# Altium PCB 矩形板V2.0.pcbdoc (part 1 of 2)
Units mm, origin at the board's own origin, x right, y up, seen from the top; angles counter-clockwise.
Board outline 153.82 x 190.84 mm, 2 copper layers (Top Layer, Bottom Layer); 141 components, 208 nets, 656 pads, 250 vias.
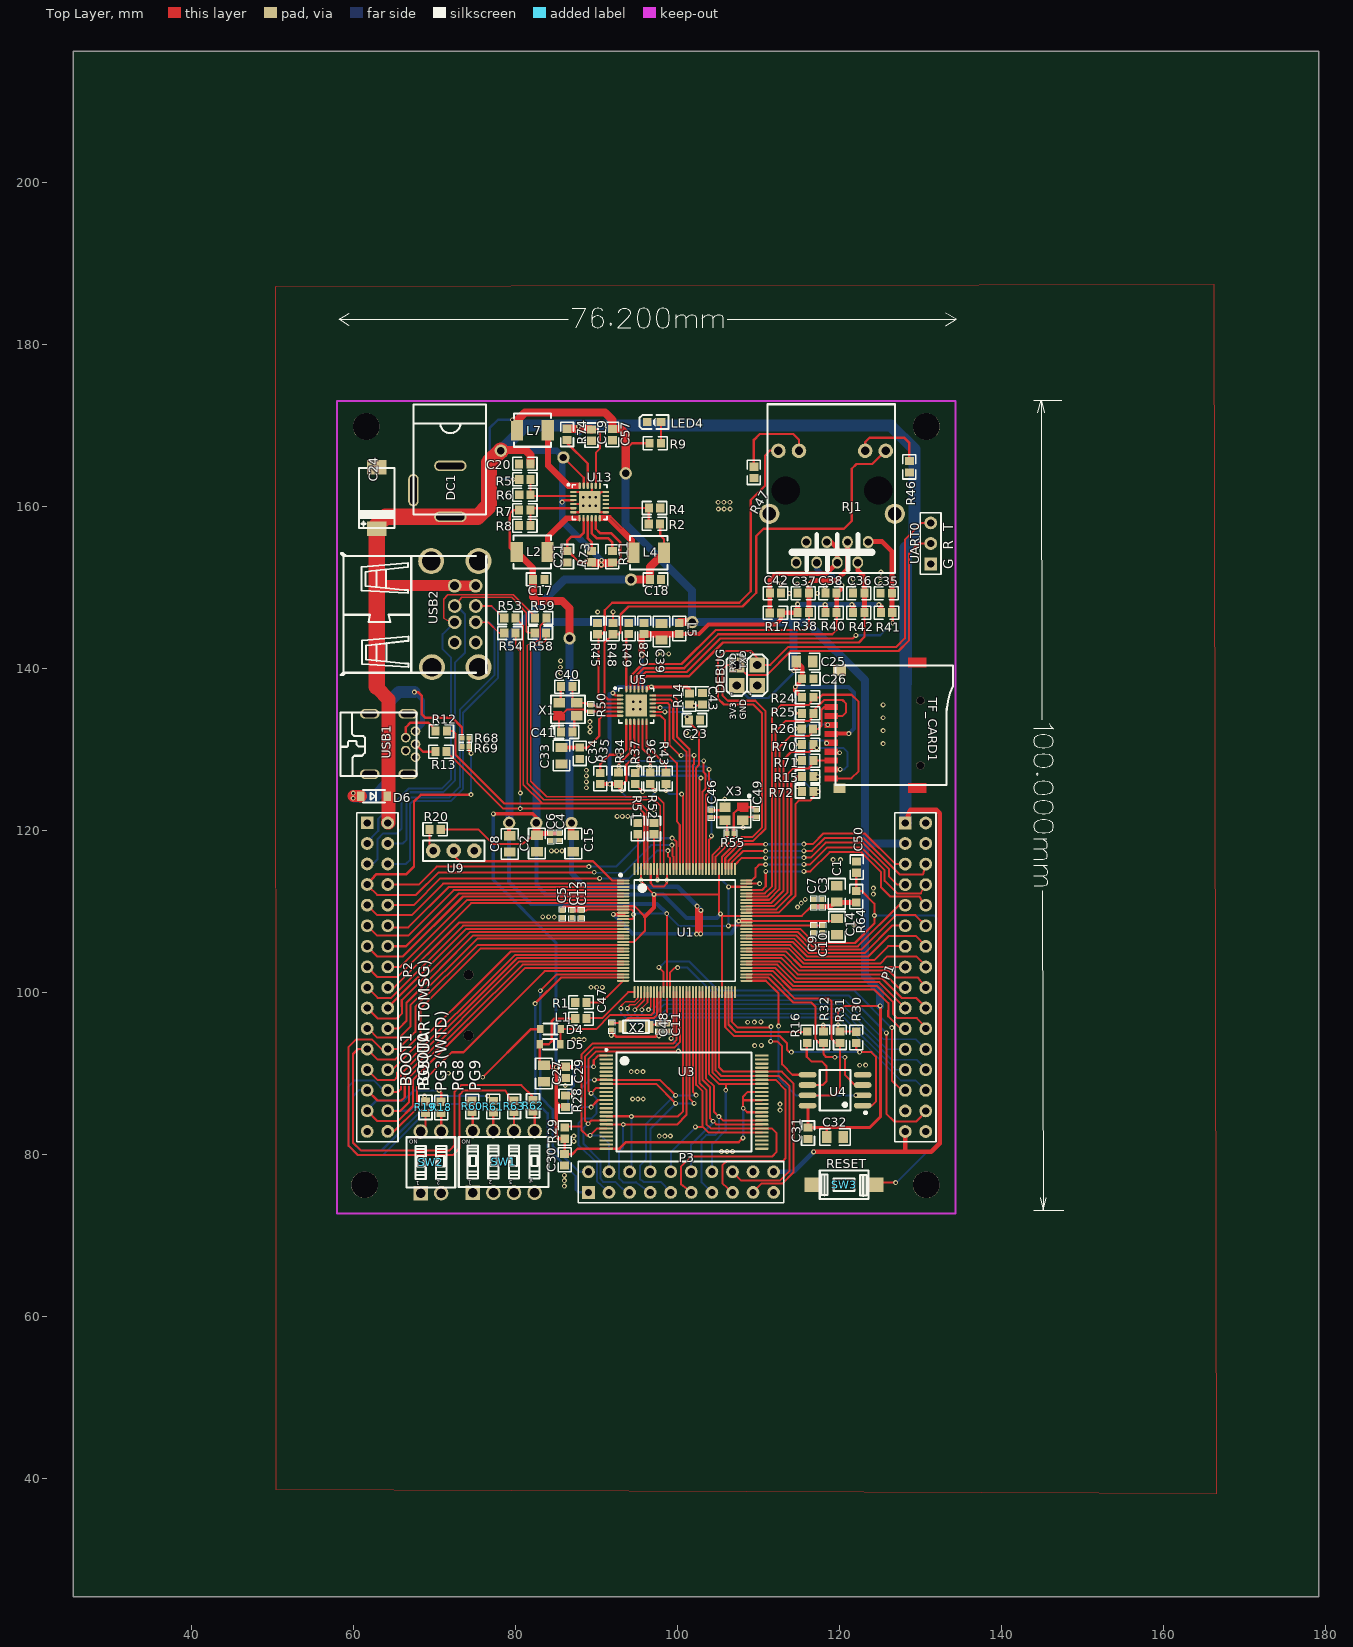
[diagram p0: Top Layer view]
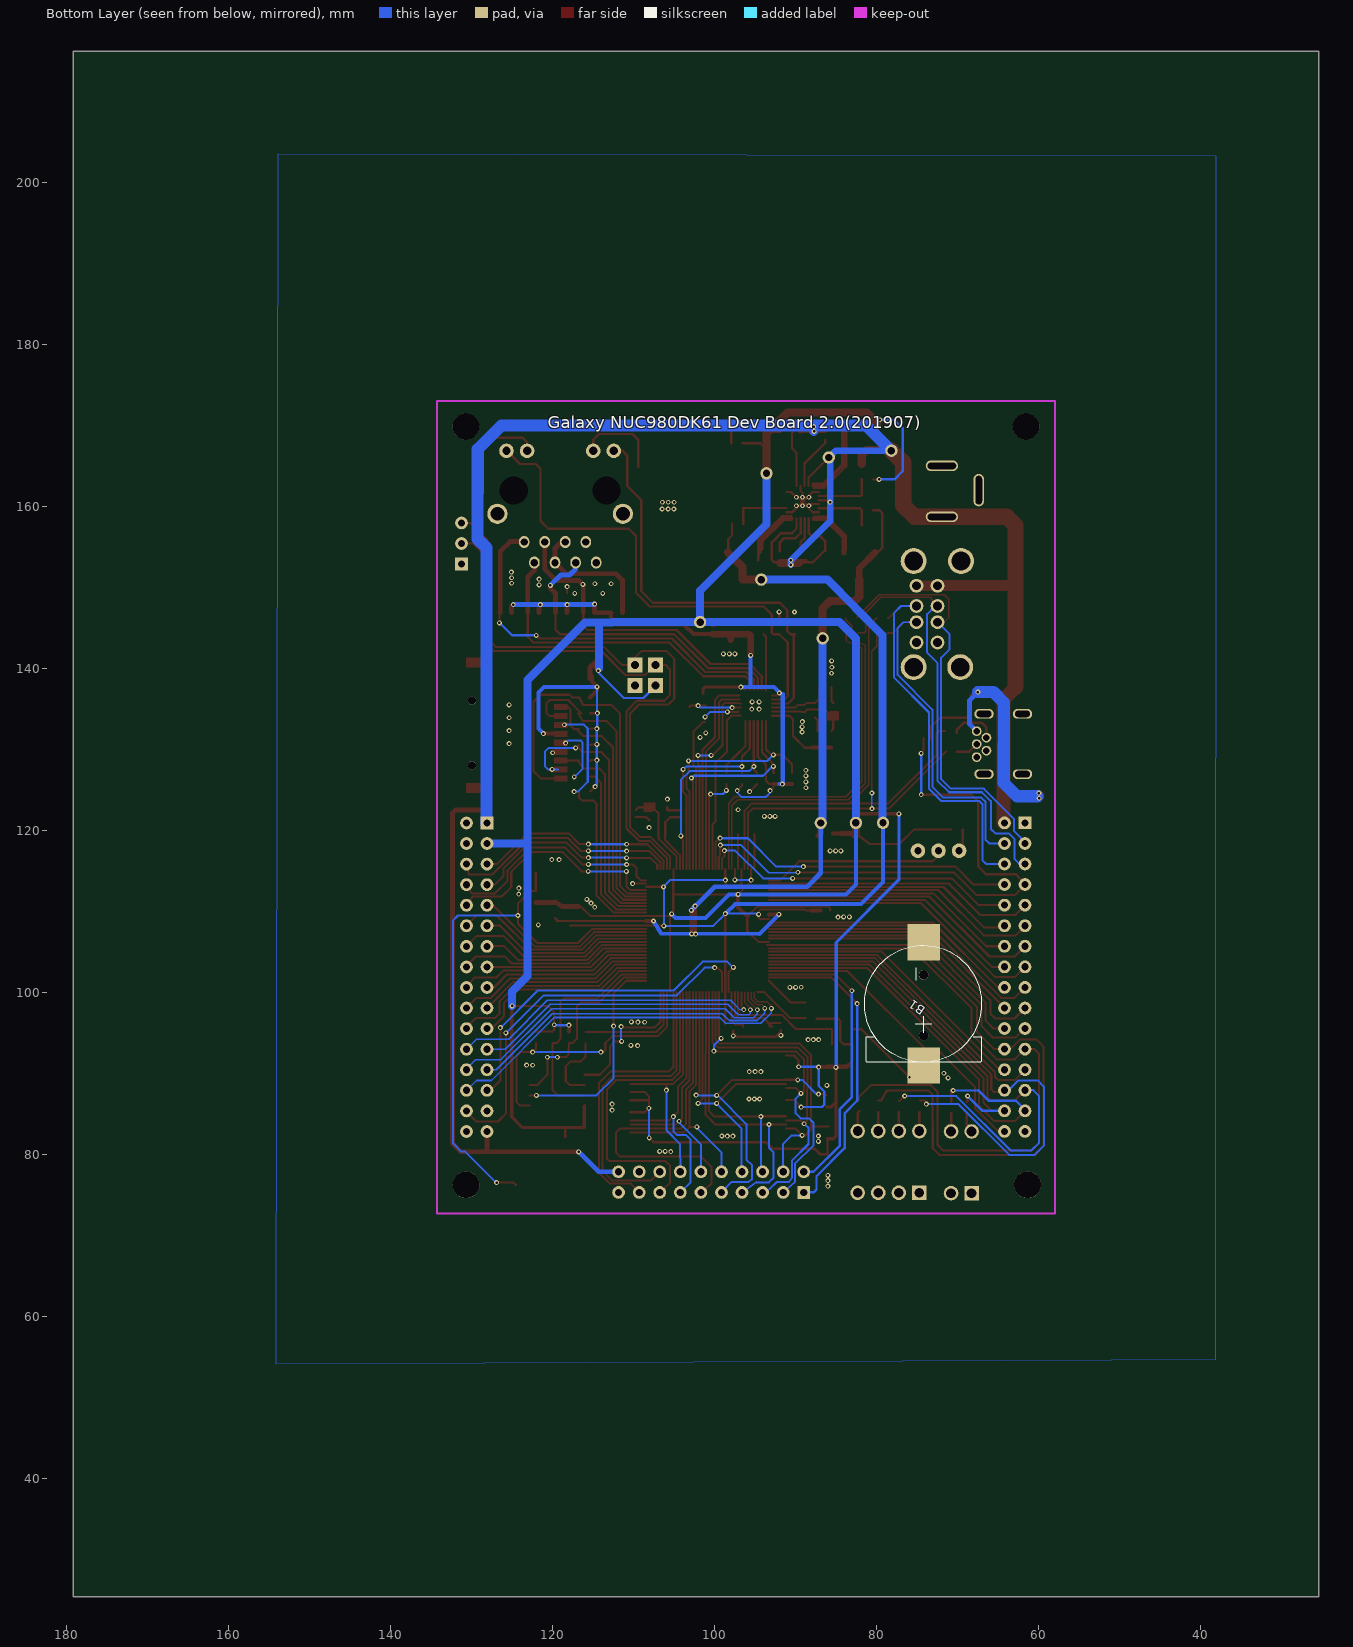
[diagram p1: Bottom Layer view, seen from below]

## Layer stack, top to bottom
Top Layer: signal copper (thickness not stored)
Dielectric: dielectric 0.32, FR-4, Dk 4.8
Bottom Layer: signal copper (thickness not stored)

## Board outline
179.22,25.4 25.4,25.4 25.4,216.24 179.22,216.24

## Components (designator, comment, footprint, x,y, rotation, side; value= is the part's Value field where it differs from the comment)
B1 "CR1220-2" BATTERY-2 74.21,98.62 r270 bottom
C1 "10uF" 0805 119.686,112.199 r270 top
C2 "10uF" 0805 82.652,118.431 r90 top
C3 "100nF" 0402 117.87,111.06 r270 top
C4 "100nF" 0402 85.41,119.24 r90 top
C5 "100nF" 0402 85.79,109.72 r90 top
C6 "100nF" 0402 84.33,119.22 r90 top
C7 "100nF" 0402 116.85,111.06 r270 top
C8 "10uF" 0805 79.29,118.376 r90 top
C9 "100nF" 0402 116.85,107.84 r90 top
C10 "100nF" 0402 117.93,107.84 r90 top
C11 "100nF" 0402 98.75,95.72 r90 top
C12 "100nF" 0402 86.97,109.7 r90 top
C13 "100nF" 0402 88.13,109.7 r90 top
C14 "10uF" 0805 119.71,108.14 r90 top
C15 "10uF" 0805 87.15,118.42 r90 top
C17 "10uF" 0603 82.866,151.022 r180 top
C18 "22uF" 0603 97.296,151.012 r180 top
C19 "10uF" 0603 89.396,168.842 r90 top
C20 "10uF" 0603 81.158,165.289 r0 top
C21 "10uF" 0603 86.376,153.832 r90 top
C23 "15pF" 0603 102.11,133.66 r180 top
C24 "470uF" CAP-T7343-D 62.88,161.07 r90 top
C25 "10uF" 0805 115.69,140.88 r180 top
C26 "100nF" 0603 116.11,138.76 r180 top
C27 "10uF" 0805 83.513,90.014 r90 top
C28 "100nF" 0603 95.89,144.96 r270 top
C29 "100nF" 0603 86.18,90.141 r270 top
C30 "100nF" 0603 86.07,79.36 r90 top
C31 "100nF" 0603 116.13,82.64 r270 top
C32 "10uF" 0805 119.46,82.164 r0 top
C33 "10uF" 0805 85.686,129.249 r270 top
C34 "100nF" 0603 87.936,129.549 r270 top
C35 "10pF" 0603 125.791,149.316 r180 top
C36 "10pF" 0603 122.399,149.327 r180 top
C37 "10pF" 0603 115.541,149.327 r180 top
C38 "10pF" 0603 118.97,149.327 r180 top
C39 "10uF" 0805 98.03,144.56 r270 top
C40 "22pF" 0603 86.35,137.78 r180 top
C41 "22pF" 0603 86.33,132.18 r180 top
C42 "22nF" 0603 112.112,149.327 r0 top
C43 "100nF" 0603 103.087,136.287 r270 top
C46 "15pF" 0402 104.15,122.08 r270 top
C47 "15pF" 0402 91.87,95.8 r90 top
C48 "15pF" 0402 97.71,95.71 r90 top
C49 "15pF" 0402 109.75,122.12 r90 top
C50 "1uF" 0603 122.136,115.499 r270 top
C57 "10uF" 0603 91.976,168.912 r90 top
D4 "1N4148WS T4" SOD-323 84.33,95.5 r0 top
D5 "1N4148WS T4" SOD-323 84.27,93.62 r0 top
D6 "DSK14" SOD-123 62.53,124.24 r180 top
DC1 "DC005-2.5MM" DC-5020 69.68,161.9 r270 top
DEBUG "4pin2x2" 4PINO 109.87,140.47 r270 top
L1 "0Ω" 0603 88.091,96.78 r0 top
L2 "1.5uH" L-SMD-4.1X4.6 82.066,154.402 r0 top
L4 "1uH" L-SMD-4.1X4.6 96.456,154.322 r180 top
L5 "0Ω" 0603 100.23,144.96 r270 top
L7 "1.5uH" L-SMD-4.1X4.6 82.096,169.452 r0 top
LED4 "KT-0603R" LED-0603 97.126,170.442 r0 top
P1 "Header-Female-2.54_2x16" HDR-16X2/2.54 130.67,100.63 r270 top
P2 "Header-Female-2.54_2x16" HDR-16X2/2.54 64.23,100.64 r270 top
P3 "Header-Female-2.54_2x10" HDR-10X2/2.54 100.45,76.6 r0 top
R1 "0" 0603 88.09,98.8 r0 top
R2 "100K" 0603 97.166,157.882 r0 top
R4 "100K" 0603 97.176,159.842 r180 top
R5 "510K" 0603 81.166,163.382 r180 top
R6 "110K" 0603 81.166,161.477 r0 top
R7 "200K" 0603 81.158,159.574 r180 top
R8 "100K" 0603 81.158,157.669 r0 top
R9 "1K" 0603 97.266,167.842 r0 top
R11 "1K" 0603 91.966,153.822 r90 top
R12 "27" 0603 70.85,132.28 r0 top
R13 "27" 0603 70.81,129.76 r0 top
R14 "33" 0603 101.47,136.26 r90 top
R15 "0" 0603 116.09,126.69 r0 top
R16 "0" 0603 116.03,94.48 r90 top
R17 "0" 0603 112.1,146.89 r0 top
R18 "10K" 0603 70.82,85.82 r270 top
R19 "10K" 0603 68.89,85.83 r270 top
R20 "10K" 0603 70.08,120.16 r0 top
R24 "10K" 0603 116.09,136.47 r180 top
R25 "10K" 0603 116.09,134.49 r180 top
R26 "10K" 0603 116.05,132.57 r180 top
R28 "100K" 0603 86.18,86.585 r270 top
R29 "100K" 0603 86.086,82.649 r90 top
R30 "10K" 0603 122.09,94.46 r90 top
R31 "10K" 0603 120.07,94.48 r90 top
R32 "10K" 0603 118.03,94.48 r90 top
R34 "4.7K" 0603 92.73,126.46 r90 top
R35 "4.7K" 0603 90.47,126.44 r90 top
R36 "4.7K" 0603 96.65,126.46 r90 top
R37 "4.7K" 0603 94.79,126.44 r90 top
R38 "49.9" 0603 115.541,146.914 r180 top
R40 "49.9" 0603 118.97,146.914 r180 top
R41 "49.9" 0603 125.828,146.914 r180 top
R42 "49.9" 0603 122.399,146.914 r180 top
R43 "510" 0603 98.57,126.46 r90 top
R45 "10K" 0603 90.13,144.951 r270 top
R46 "470" 0603 128.64,164.93 r90 top
R47 "470" 0603 109.44,164.24 r90 top
R48 "10K" 0603 92.035,144.951 r270 top
R49 "12.1K" 0603 93.99,144.96 r270 top
R50 "1M" 0402 89.286,135.099 r90 top
R51 "12.1K" 0603 95.109,120.254 r270 top
R52 "12.1K" 0603 97.11,120.254 r270 top
R53 "4.7" 0603 79.32,146.26 r0 top
R54 "4.7" 0603 79.32,144.4 r0 top
R55 "1M" 0402 106.545,119.638 r180 top
R58 "4.7" 0603 83.08,144.42 r0 top
R59 "4.7" 0603 83.13,146.26 r0 top
R60 "10K" 0603 74.66,85.95 r270 top
R61 "10K" 0603 77.27,85.93 r270 top
R62 "10K" 0603 82.17,86.03 r270 top
R63 "10K" 0603 79.83,85.95 r270 top
R64 "100K" 0603 122.086,111.849 r270 top
R68 "20K" 0402 73.83,131.43 r180 top
R69 "39K" 0402 73.82,130.35 r0 top
R70 "10K" 0603 116.09,130.63 r180 top
R71 "10K" 0603 116.09,128.65 r180 top
R72 "10K" 0603 116.09,124.83 r180 top
R73 "1K" 0603 89.406,153.842 r90 top
R74 "1K" 0603 86.376,168.932 r90 top
RJ1 "HR911105A" RJ45-LIGHT 119.1,160 r180 top
SW1 "NDI-04H-V" NDI-04H-V 78.55,79.09 r0 top
SW2 "NDI-02H-V" NDI-02H-V 69.56,79.04 r0 top
SW3 "RESET" KEY-TOUCH-SMD-6.0*3.5*H-(A) 120.58,76.27 r0 top
TF_CARD1 "TF_CARD" TF-115_MRS 119.02,126.45 r0 top
U1 "NUC980DK61Y" LQFP-128_14X14X04P 100.91,107.66 r0 top
U3 "MT29F2G08ABAEAWP-IT:E" TSOP-48 100.82,86.48 r90 top
U4 "W25Q128JVSIQTR" SOIC-8_208MIL 119.48,87.95 r180 top
U5 "LAN8720AI" QFN-24_4X4X05P 94.93,135.46 r0 top
U9 "3pin插针" 3PIN插针 74.92,117.52 r180 top
U13 "EA3059C" QFN-24_4X4X05P 89.16,160.59 r0 top
UART0 "2.54排针 3pin" HDR-3X1/2.54 131.28,155.46 r90 top
USB1 "Mini USB-B 5P-Female-TH_C46398" USB-MINI-2 64.83,130.7 r270 top
USB2 "Double layer DIP 90° black" USB-M-51 72.52,146.74 r270 top
X1 "25MHz" OSC-YSX-3225_4P 86.49,134.98 r0 top
X2 "32.768KHz" SMD-3215_2P 94.87,95.78 r0 top
X3 "12MHz" OSC-YSX-3225_4P 106.97,122.08 r180 top
? "" ? 96.32,183.303 r0 top
? "" ? 145.855,123.145 r0 top

## Footprints (in the part's own frame and the unit in brackets; to place one, negate y for a bottom-side part, rotate by r counter-clockwise, add the part's x,y. Pads: shape width x height; smd on the part's side, far side on the other; paste and mask are expansions set on the pad)
3PIN插针 [mm]
  round 1.8 hole 0.9: 1(0,0) 2(2.54,0) 3(5.08,0)
  silkscreen extent -1.27,-1.27 6.35,1.27
4PINO [mil]
  rect 74x74 hole 40: a(0,0) b(100,0) c(0,-100) d(100,-100)
  silkscreen extent -50,-150 150,50
0402 [mm]
  rect 0.6x0.65 smd: 1(-0.424,0) 2(0.424,0)
  silkscreen extent -0.82,-0.43 0.81,0.43
0603 [mm]
  rect 1x1.1 smd: 1(-0.7,0) 2(0.7,0)
  silkscreen extent -1.5,-0.8 1.5,0.8
0805 [mm]
  rect 1.16x1.45 smd: 1(-1.016,0) 2(1.016,0)
  silkscreen extent -1.9,-1.03 1.87,1.04
BATTERY-2 [mm]
  round 1.2 hole 1.2: 0(-3.581,0) 0(3.912,0)
  rect 4.5x4 smd: 1(7.62,0) 2(-7.62,0)
  silkscreen extent -7.22,-7.3 7.22,7.14
CAP-T7343-D [mm]
  rect 1.8x2.4 smd: 1(-3.81,0) 2(3.81,0)
  silkscreen extent -3.7,-2.2 3.7,2.2
DC-5020 [mm]
  oval 1.3x3.999 hole 0.8 slot 3.5 at 90 deg copper offset 0,0: 1(3.15,2.275) 2(-3.15,2.275)
  oval 3.999x1.3 hole 0.8 slot 3.5 at 0 deg copper offset 0,0: 3(-0.15,-2.275)
  silkscreen extent -10.75,-2.28 2.85,6.67
HDR-3X1/2.54 [mil]
  rect 62x62 hole 35: 1(-100,0)
  round 62 hole 35: 2(0,0) 3(100,0)
  silkscreen extent -150,-50 150,50
HDR-10X2/2.54 [mil]
  rect 62x62 hole 35: 1(-450,-50)
  round 62 hole 35: 2(-450,50) 3(-350,-50) 4(-350,50) 5(-250,-50) 6(-250,50) 7(-150,-50) 8(-150,50) 9(-50,-50) 10(-50,50) 11(50,-50) 12(50,50) 13(150,-50) 14(150,50) 15(250,-50) 16(250,50) 17(350,-50) 18(350,50) 19(450,-50) 20(450,50)
  silkscreen extent -500,-100 500,100
HDR-16X2/2.54 [mil]
  rect 62x62 hole 35: 1(-800,-100)
  round 62 hole 35: 2(-800,0) 3(-700,-100) 4(-700,0) 5(-600,-100) 6(-600,0) 7(-500,-100) 8(-500,0) 9(-400,-100) 10(-400,0) 11(-300,-100) 12(-300,0) 13(-200,-100) 14(-200,0) 15(-100,-100) 16(-100,0) 17(0,-100) 18(0,0) 19(100,-100) 20(100,0) 21(200,-100) 22(200,0) 23(300,-100) 24(300,0) 25(400,-100) 26(400,0) 27(500,-100) 28(500,0) 29(600,-100) 30(600,0) 31(700,-100) 32(700,0)
  silkscreen extent -850,-150 750,50
KEY-TOUCH-SMD-6.0*3.5*H-(A) [mm]
  rect 1.8x1.8 smd: 1(-4,0) 2(4,0)
  silkscreen extent -3,-1.75 3,1.75
L-SMD-4.1X4.6 [mm]
  rect 1.5x2.5 smd: 1(-1.9,0) 2(1.9,0)
  silkscreen extent -2.3,-2.05 2.3,2.05
LED-0603 [mil]
  rect 43x39 smd: 1(33.5,0) 2(-33.5,0)
  silkscreen extent -72,-34 70,34
LQFP-128_14X14X04P [mm]
  oval 1.5x0.25 smd: 1(-7.6,6.2) 2(-7.6,5.799) 3(-7.6,5.4) 4(-7.6,5.001) 5(-7.6,4.6) 6(-7.6,4.201) 7(-7.6,3.8) 8(-7.6,3.401) 9(-7.6,3) 10(-7.6,2.601) 11(-7.6,2.2) 12(-7.6,1.801) 13(-7.6,1.4) 14(-7.6,1.001) 15(-7.6,0.599) 16(-7.6,0.201) 17(-7.6,-0.201) 18(-7.6,-0.599) 19(-7.6,-1.001) 20(-7.6,-1.4) 21(-7.6,-1.801) 22(-7.6,-2.2) 23(-7.6,-2.601) 24(-7.6,-3) 25(-7.6,-3.401) 26(-7.6,-3.8) 27(-7.6,-4.201) 28(-7.6,-4.6) 29(-7.6,-5.001) 30(-7.6,-5.4) 31(-7.6,-5.799) 32(-7.6,-6.2) 65(7.6,-6.2) 66(7.6,-5.799) 67(7.6,-5.4) 68(7.6,-5.001) 69(7.6,-4.6) 70(7.6,-4.201) 71(7.6,-3.8) 72(7.6,-3.401) 73(7.6,-3) 74(7.6,-2.601) 75(7.6,-2.2) 76(7.6,-1.801) 77(7.6,-1.4) 78(7.6,-1.001) 79(7.6,-0.599) 80(7.6,-0.201) 81(7.6,0.201) 82(7.6,0.599) 83(7.6,1.001) 84(7.6,1.4) 85(7.6,1.801) 86(7.6,2.2) 87(7.6,2.601) 88(7.6,3) 89(7.6,3.401) 90(7.6,3.8) 91(7.6,4.201) 92(7.6,4.6) 93(7.6,5.001) 94(7.6,5.4) 95(7.6,5.799) 96(7.6,6.2)
  oval 0.25x1.5 smd: 33(-6.2,-7.6) 34(-5.799,-7.6) 35(-5.4,-7.6) 36(-5.001,-7.6) 37(-4.6,-7.6) 38(-4.201,-7.6) 39(-3.8,-7.6) 40(-3.401,-7.6) 41(-3,-7.6) 42(-2.601,-7.6) 43(-2.2,-7.6) 44(-1.801,-7.6) 45(-1.4,-7.6) 46(-1.001,-7.6) 47(-0.599,-7.6) 48(-0.201,-7.6) 49(0.201,-7.6) 50(0.599,-7.6) 51(1.001,-7.6) 52(1.4,-7.6) 53(1.801,-7.6) 54(2.2,-7.6) 55(2.601,-7.6) 56(3,-7.6) 57(3.401,-7.6) 58(3.8,-7.6) 59(4.201,-7.6) 60(4.6,-7.6) 61(5.001,-7.6) 62(5.4,-7.6) 63(5.799,-7.6) 64(6.2,-7.6) 97(6.2,7.6) 98(5.799,7.6) 99(5.4,7.6) 100(5.001,7.6) 101(4.6,7.6) 102(4.201,7.6) 103(3.8,7.6) 104(3.401,7.6) 105(3,7.6) 106(2.601,7.6) 107(2.2,7.6) 108(1.801,7.6) 109(1.4,7.6) 110(1.001,7.6) 111(0.599,7.6) 112(0.201,7.6) 113(-0.201,7.6) 114(-0.599,7.6) 115(-1.001,7.6) 116(-1.4,7.6) 117(-1.801,7.6) 118(-2.2,7.6) 119(-2.601,7.6) 120(-3,7.6) 121(-3.401,7.6) 122(-3.8,7.6) 123(-4.201,7.6) 124(-4.6,7.6) 125(-5.001,7.6) 126(-5.4,7.6) 127(-5.799,7.6) 128(-6.2,7.6)
  silkscreen extent -8.07,-6.25 6.25,7
NDI-02H-V [mm]
  rect 1.8x1.8 hole 1.2: 1(-1.27,-3.81)
  round 1.8 hole 1.2: 2(1.27,-3.81) 3(1.27,3.81) 4(-1.27,3.81)
  silkscreen extent -3.01,-3.1 3.01,3.1
NDI-04H-V [mm]
  rect 1.8x1.8 hole 1.2: 1(-3.81,-3.81)
  round 1.8 hole 1.2: 2(-1.27,-3.81) 3(1.27,-3.81) 4(3.81,-3.81) 5(3.81,3.81) 6(1.27,3.81) 7(-1.27,3.81) 8(-3.81,3.81)
  silkscreen extent -5.55,-3.1 5.55,3.1
OSC-YSX-3225_4P [mm]
  round 0 smd: 1(-1.1,-0.8)
  rect 1.4x1.15 smd: 2(1.1,-0.8) 3(1.1,0.8) 4(-1.1,0.8)
  Top Layer region: -1.8,-0.225 -0.762,-0.225 -0.4,-0.604 -0.4,-1.375 -1.8,-1.375
  silkscreen extent -2.1,-2.35 2.1,1.7
QFN-24_4X4X05P [mm]
  oval 0.796x0.28 smd: 1(-2,1.232) 2(-2,0.732) 3(-2,0.231) 4(-2,-0.267) 5(-2,-0.767) 6(-2,-1.267) 13(2,-1.257) 14(2,-0.757) 15(2,-0.257) 16(2,0.241) 17(2,0.742) 18(2,1.242)
  oval 0.28x0.796 smd: 7(-1.245,-2) 8(-0.744,-2) 9(-0.244,-2) 10(0.254,-2) 11(0.754,-2) 12(1.255,-2) 19(1.27,2) 20(0.77,2) 21(0.269,2) 22(-0.229,2) 23(-0.729,2) 24(-1.229,2)
  rect 2.68x2.68 smd: 25(0,-0.013)
  silkscreen extent -2.84,-2.16 2.15,2.35
RJ45-LIGHT [mm]
  oval 1.3x1.499 hole 0.914 copper offset 0,0: 1(-4.445,4.355) 2(-3.175,6.895) 3(-1.905,4.355) 4(-0.635,6.895) 5(0.635,4.355) 6(1.905,6.895) 7(3.175,4.355) 8(4.445,6.895)
  round 1.8 hole 1.04: 9(-6.625,-6.895) 10(-4.085,-6.895) 11(4.085,-6.895) 12(6.625,-6.895)
  round 2.5 hole 1.702: 13(-7.75,0.875) 14(7.75,0.875)
  round 2 hole 3.5 unplated: 15(5.715,-1.995) 16(-5.715,-1.995)
  silkscreen extent -7.78,-12.65 7.96,8.18
SMD-3215_2P [mm]
  rect 1x1.524 smd: 1(-1.648,0.024) 2(1.648,-0.024)
  silkscreen extent -1.6,-0.75 1.6,0.75
SOD-123 [mil]
  rect 35.8x48 smd: 1(64,0) 2(-64,0)
  silkscreen extent -53,-31 53,31
SOD-323 [mm]
  rect 0.8x1 smd: 1(-1.27,0) 2(1.27,0)
  silkscreen extent -0.89,-0.66 0.89,0.66
SOIC-8_208MIL [mm]
  oval 2.2x0.7 smd: 1(-3.4,1.905) 2(-3.4,0.635) 3(-3.4,-0.635) 4(-3.4,-1.905) 5(3.4,-1.905) 6(3.4,-0.635) 7(3.4,0.635) 8(3.4,1.905)
  silkscreen extent -3.9,-2.5 1.9,2.95
TF-115_MRS [mm]
  round 0 smd: 1(0,8.8) 2(0,7.7) 3(0,6.6) 4(0,5.5) 5(0,4.4) 6(0,3.3) 7(0,2.2) 8(0,1.1) 9(0,0) 11(10.6,-1.2) 12(10.6,14.3)
  rect 1.5x1.2 smd: 10(1,-1.2)
  rect 1.6x1.5 smd: 13(1,13.4)
  round 1 hole 1 unplated: ""(11,1.6) ""(11,9.6)
  Top Layer region: -0.8,-0.351 -0.8,0.351 0.8,0.351 0.8,-0.351
  Top Layer region: -0.8,0.749 -0.8,1.45 0.8,1.45 0.8,0.749
  Top Layer region: -0.8,1.849 -0.8,2.55 0.8,2.55 0.8,1.849
  Top Layer region: -0.8,2.949 -0.8,3.65 0.8,3.65 0.8,2.949
  Top Layer region: -0.8,4.049 -0.8,4.75 0.8,4.75 0.8,4.049
  Top Layer region: -0.8,5.151 -0.8,5.85 0.8,5.85 0.8,5.151
  Top Layer region: -0.8,6.251 -0.8,6.949 0.8,6.949 0.8,6.251
  Top Layer region: -0.8,7.351 -0.8,8.049 0.8,8.049 0.8,7.351
  Top Layer region: -0.8,8.451 -0.8,9.149 0.8,9.149 0.8,8.451
  Top Layer region: 9.499,13.701 9.499,14.9 11.699,14.9 11.699,13.701
  Top Layer region: 9.499,-1.801 9.499,-0.6 11.699,-0.6 11.699,-1.801
  silkscreen extent 0.5,-0.82 15,13.92
TSOP-48 [mm]
  oval 0.28x1.696 smd: 1(5.75,9.6) 2(5.25,9.6) 3(4.75,9.6) 4(4.25,9.6) 5(3.75,9.6) 6(3.25,9.6) 7(2.75,9.6) 8(2.25,9.6) 9(1.75,9.6) 10(1.25,9.6) 11(0.75,9.6) 12(0.25,9.6) 13(-0.25,9.6) 14(-0.75,9.6) 15(-1.25,9.6) 16(-1.75,9.6) 17(-2.25,9.6) 18(-2.75,9.6) 19(-3.25,9.6) 20(-3.75,9.6) 21(-4.25,9.6) 22(-4.75,9.6) 23(-5.25,9.6) 24(-5.75,9.6) 25(-5.75,-9.6) 26(-5.25,-9.6) 27(-4.75,-9.6) 28(-4.25,-9.6) 29(-3.75,-9.6) 30(-3.25,-9.6) 31(-2.75,-9.6) 32(-2.25,-9.6) 33(-1.75,-9.6) 34(-1.25,-9.6) 35(-0.75,-9.6) 36(-0.25,-9.6) 37(0.25,-9.6) 38(0.75,-9.6) 39(1.25,-9.6) 40(1.75,-9.6) 41(2.25,-9.6) 42(2.75,-9.6) 43(3.25,-9.6) 44(3.75,-9.6) 45(4.25,-9.6) 46(4.75,-9.6) 47(5.25,-9.6) 48(5.75,-9.6)
  silkscreen extent -6.1,-8.35 6.58,9.72
USB-M-51 [mm]
  round 3.2 hole 2.3: 0(-6.551,-2.925) 0(-6.551,2.925) 0(6.551,-2.826) 0(6.551,2.925)
  round 1.7 hole 1.1: 1(-3.5,2.574) 2(-1.001,2.574) 3(1.001,2.574) 4(3.5,2.574) 5(-3.5,-0.027) 6(-1.001,-0.027) 7(1.001,-0.027) 8(3.5,-0.027)
  silkscreen extent -7.52,-14.13 7.54,3.87
USB-MINI-2 [mm]
  oval 1.2x2.4 hole 0.8 slot 1.8 at 90 deg copper offset 0,0: 0(-3.72,1.924) 0(-3.72,-2.826) 0(3.72,1.924) 0(3.72,-2.826)
  round 1.2 hole 0.8: 1(-1.58,2.826) 2(-0.78,1.622) 3(0.02,2.826) 4(0.82,1.622) 5(1.62,2.826)
  silkscreen extent -3.89,-6.42 3.96,2.93
? [mm]
  silkscreen extent -38.1,-1.21 38.1,1.21

## Free pads (board coordinates)
  round 1.524 hole 0.914: 1(78.196,166.922) 1(85.926,166.082) 2(86.68,143.75) 2(93.616,164.122) 2(94.266,151.003) 2(101.82,145.75) 4(79.23,120.96) 4(82.58,120.95) 4(86.92,120.94)
  round 3.302 hole 3.302 unplated: ""(61.38,76.26) ""(61.57,169.9) ""(130.72,76.26) ""(130.74,169.9)

## Via types
v1: diameter 0.61, hole 0.305, Top Layer to Bottom Layer, 250 vias

## Nets (pads, with @x,y where several pads share a name; then routed paths per layer and width w, separated by ;. In a path a pad name is that pad's centre, name@x,y a point inside that pad or via, vN(x,y) a via of type N, cw(c..) or ccw(c..) an arc to the next point about the centre after c; other vN are vias at no path point)
1.2V: C8.2 C9.2 C10.2 C11.2 C12.2 C13.2 C18.2 L4.1 pad.2@94.266,151.003 pad.4@79.23,120.96 R2.2 U1.10 U1.13 U1.43 U1.82 U1.94 U1.118 U1.123 | length 149.7
  Top Layer w0.25: U1.43@98.712,100.067 98.712,96.182 C11.2@98.75,96.144
  Top Layer w0.254: C13.2@88.13,110.124 88.753,110.124 88.89,110.261 91.87,110.261 U1.10@93.31,110.261
  Top Layer w0.26: U1.13@93.312,109.066 94.405,109.066 94.585,109.249 v1(94.585,109.649) 94.585,110.013 94.387,110.247 U1.10@93.312,110.267 ; U1.123@96.712,115.266 96.712,113.516 97.07,113.079 98.304,113.079 98.69,113.48 98.685,113.899 98.712,113.925 U1.118@98.712,115.266 ; v1(98.686,109.749) 98.712,109.722 U1.43@98.712,100.067 ; v1(106.286,108.249) 106.303,108.266 106.569,108.266 108.512,108.266 116.848,108.266 C9.2@116.85,108.264 ; v1(106.336,113.049) 106.354,113.067 U1.94@108.512,113.067 ; C9.2@116.729,108.281 C10.2@117.88,108.281
  Top Layer w0.28: R2.2@97.866,157.882 97.866,156.462 98.356,155.972 L4.1@98.356,154.322
  Top Layer w0.5: pad.4@79.23,120.96 79.23,119.452 C8.2@79.29,119.392 ; C12.2@86.97,110.144 86.99,110.124 C13.2@88.13,110.124
  Top Layer w1: pad.2@94.266,151.003 96.586,151.002 C18.2@96.596,151.012 96.596,152.562 L4.1@98.356,154.322
  Bottom Layer w0.26: v1(94.585,109.649) 94.685,109.749 v1(98.686,109.749) 100.181,108.248 v1@106.285,108.248 ; v1(98.686,113.899) 105.487,113.9 v1@106.335,113.049 ; v1(106.286,108.249) 106.286,112.999 v1(106.336,113.049)
  Bottom Layer w0.5: pad.4@79.23,120.96 79.23,113.659 81.929,110.96 96.97,110.96 97.474,110.96 v1@98.685,109.749
  Bottom Layer w1: pad.4@79.229,120.96 79.275,121.004 79.275,144.135 86.082,151.001 pad.2@94.266,151.001
1.8V: C14.2 C15.2 C17.2 L2.1 pad.2@86.68,143.75 pad.4@86.92,120.94 R7.2 U1.11 U1.12 U1.83 U1.84 | length 108.8
  Top Layer w0.26: U1.12@93.31,109.461 93.312,109.463 U1.12@93.312,109.467 ; U1.83@108.51,108.661 108.51,108.665 U1.83@108.512,108.667
  Top Layer w0.3: L2.1@80.166,154.402 79.856,154.402 79.316,154.902 79.322,159.21 79.673,159.566 R7.2@80.458,159.566 ; v1(107.57,108.84) 119.527,108.84 119.527,108.973 C14.2@119.71,109.156
  Top Layer w0.5: v1(92.086,109.649) 93.095,109.649 93.312,109.66 ; v1(102.37,107.22) 102.43,107.28 v1(102.43,110.68) ; v1(102.87,107.24) 102.89,107.26 v1(102.89,110.16) ; v1(107.57,108.84) 108.508,108.84 108.512,108.836
  Top Layer w0.8: L2.1@80.166,154.402 82.166,152.402 C17.2@82.166,151.022 ; pad.4@86.92,120.94 86.92,119.666 C15.2@87.15,119.436
  Top Layer w1: C17.2@82.166,151.022 82.166,148.853 82.66,148.36 85.78,148.36 86.68,147.46 86.68,147.06 pad.2@86.68,143.75
  Bottom Layer w0.5: v1@92.086,109.64 94.487,107.25 106.63,107.28 v1(107.57,108.84)
  Bottom Layer w0.6: pad.4@86.92,120.94 86.92,114.768 88.609,113.079 100.029,113.079 102.429,110.679 102.462,110.628 102.93,110.16 v1@102.889,110.16
  Bottom Layer w1: pad.2@86.68,143.75 86.68,121.18 pad.4@86.92,120.94
3.3V: C1.2 C2.2 C3.2 C4.2 C5.2 C6.2 C7.2 C25.2 C26.2 C27.2 C29.1 C30.2 C31.1 C32.1 C57.2 D5.1 DEBUG.d L1.1 L5.1 L7.1 P1.3 pad.2@93.616,164.122 pad.2@101.82,145.75 pad.4@82.58,120.95 R5.2 R9.1 R20.2 R24.2 R25.2 R26.2 R28.2 R29.1 R30.2 R31.2 R32.2 R64.2 R70.2 R71.2 R72.2 TF_CARD1.4 U1.9 U1.20 U1.60 U1.85 U1.102 U1.121 U1.126 U3.1 U3.12 U3.24 U3.34 U3.37 U3.39 U4.8 | length 506.4
  Top Layer w0.25: C5.2@85.79,110.144 85.79,110.46 85.99,110.659 U1.9@93.31,110.66 ; v1(108.13,85.72) 108.1,85.75 108.1,87.15 108.68,87.73 U3.39@110.42,87.73 ; v1(119.83,96.03) 119.831,97.58 120.575,98.327 v1(125.04,98.35) ; R31.2@120.07,95.18 122.07,95.18 R30.2@122.09,95.16
  Top Layer w0.254: R20.2@70.78,120.16 75.393,120.16 77.193,118.36 80.859,118.36 82.363,119.447 C2.2@82.652,119.447 ; v1(79.626,170.742) 79.626,170.022 L7.1@80.196,169.452 ; v1(79.716,163.382) R5.2@80.466,163.382 ; U1.85@108.512,109.467 115.378,109.467 116.546,110.635 C7.2@116.849,110.635
  Top Layer w0.26: U1.20@93.313,106.267 94.654,106.267 95.99,107.603 95.99,109.401 94.718,110.666 U1.9@93.313,110.666 ; U1.126@95.513,115.266 v1(95.513,113.9) 95.513,113.749 97.156,112.101 105.152,112.101 U1.102@105.114,115.266 ; U1.121@97.509,115.259 97.509,113.93 v1@97.529,113.909 ; 105.133,113.696 105.136,109.899 v1(105.323,109.713) 105.568,109.467 ; U1.60@105.512,100.067 105.512,109.412 105.567,109.467 ; U1.85@108.512,109.467 105.568,109.467
  Top Layer w0.28: v1(89.35,85.87) 90.199,86.729 U3.12@91.22,86.729 ; v1(89.66,90.84) 89.66,91.66 90.23,92.23 U3.1@91.22,92.23 ; 93.826,167.272 94.396,167.842 R9.1@96.566,167.842
  Top Layer w0.3: C27.2@83.513,91.03 83,91.543 D5.1@83,93.62 83.97,93.62 84.11,93.62 84.51,94.02 84.51,96.48 84.81,96.78 L1.1@87.39,96.78 ; R29.1@86.086,81.949 86.086,80.076 C30.2@86.07,80.06 87.032,80.06 87.702,80.73 U3.24@91.22,80.73 ; U3.24@91.22,80.73 92.871,80.729 93.669,81.53 107.57,81.53 v1(108.1,82.06) ; v1(108.13,85.72) 108.62,85.23 U3.34@110.42,85.23 ; 108.13,86.73 108.989,86.73 U3.37@110.42,86.73 ; v1(114.51,134.52) 115.36,134.52 R25.2@115.39,134.49 ; v1(114.56,128.72) 115.32,128.72 R71.2@115.39,128.65 ; v1(114.56,132.61) 115.31,132.61 R26.2@115.35,132.57 ; v1(114.57,130.64) 115.38,130.64 R70.2@115.39,130.63 ; v1(114.79,125.43) R72.2@115.39,124.83 ; C32.1@118.444,82.164 118.444,83.341 ; v1(119.83,96.03) 119.83,95.42 R31.2@120.07,95.18
  Top Layer w0.4: v1(77.27,122.06) 77.27,122.09 82.14,122.09 82.58,121.65 pad.4@82.58,120.95 ; v1@85.105,90.841 v1(85.037,90.772) 85.037,86.458 ; R29.1@86.053,81.948 85.356,81.948 85.037,82.267 85.037,86.458 ; R28.2@86.18,85.885 85.61,85.885 85.037,86.458 ; U4.8@116.08,86.045 116.13,85.995 C31.1@116.13,83.34 123.76,83.341 125.081,84.659 125.081,98.349 v1(125.04,98.35)
  Top Layer w0.5: C27.2@83.513,91.03 83.702,90.841 C29.1@86.18,90.841 86.222,90.799 v1(87.186,90.799) ; C6.2@84.33,119.644 85.39,119.644 C4.2@85.41,119.664 ; 95.99,109.401 97.11,110.521 v1(97.11,112.119) ; v1(114.37,139.76) 114.674,140.064 C25.2@114.674,140.88 ; C26.2@115.19,139.119 115.19,138.4 v1(114.55,137.76) 114.55,137.31 R24.2@115.39,136.47 ; v1(118.01,95.98) 118.01,95.2 R32.2@118.03,95.18 ; 119.39,131.96 119.4,131.97 v1(121.17,131.97)
  Top Layer w0.6: C2.2@82.652,119.447 82.849,119.644 C6.2@84.33,119.644 ; C25.2@114.674,140.88 115.41,140.144 C26.2@115.41,138.76 ; C7.2@116.85,110.636 C3.2@117.87,110.636 ; C3.2@117.87,110.62 118.85,110.62 C1.2@119.686,111.181 ; C1.2@119.686,111.199 119.686,111.141 R64.2@122.086,111.141
  Top Layer w1: L7.1@80.196,169.452 80.196,170.633 81.187,171.623 91.047,171.623 91.977,170.691 C57.2@91.976,169.612 ; pad.4@82.58,120.95 82.58,119.519 C2.2@82.652,119.447 ; C57.2@91.976,169.612 93.056,169.612 93.626,169.042 93.626,164.132 pad.2@93.616,164.122 ; L5.1@100.23,145.66 100.23,145.71 100.27,145.75 pad.2@101.82,145.75
  Bottom Layer w0.26: v1(95.513,113.9) 95.523,113.91 v1(97.53,113.91)
  Bottom Layer w0.28: v1@87.186,90.798 87.186,90.84 v1(89.66,90.84)
  Bottom Layer w0.3: v1@79.625,170.742 77.842,170.742 76.811,169.711 76.811,164.382 77.806,163.381 v1@79.716,163.381 ; v1@87.187,90.798 87.187,88.507 86.481,87.771 86.489,86.163 86.783,85.87 v1(89.35,85.87) ; DEBUG.d@107.33,137.93 107.331,137.839 108.789,136.381 111.249,136.381 114.341,139.47 114.341,139.73 v1(114.37,139.76) ; v1(108.1,82.06) 108.13,82.06 v1(108.13,85.72) ; v1(114.55,137.76) 114.55,134.52 v1(114.51,134.52) 114.51,132.66 v1(114.56,132.61) 114.56,130.65 v1(114.57,130.64) 114.57,128.73 v1(114.56,128.72) 114.56,125.66 v1(114.79,125.43) ; v1(118.01,95.98) 119.83,95.98 v1(119.83,96.03)
  Bottom Layer w0.4: v1(77.27,122.06) 77.27,113.92 85,106.188 85,90.808 v1(85.037,90.772)
  Bottom Layer w0.5: pad.4@82.58,120.95 82.58,113.33 83.791,112.119 v1(97.11,112.119) 98.251,112.119 101.149,109.221 104.862,109.221 v1@105.325,109.708 ; v1(114.55,137.76) 121.11,137.76 121.79,137.072 121.79,132.59 v1(121.17,131.97)
  Bottom Layer w1: pad.4@82.58,120.95 82.58,143.71 84.62,145.75 pad.2@101.82,145.75 ; pad.2@93.615,164.123 93.615,157.834 101.82,149.629 pad.2@101.82,145.751 ; 112.609,145.731 112.59,145.75 pad.2@101.82,145.75 ; v1@114.32,140.04 114.319,141.42 114.319,145.72 112.609,145.72 116.011,145.72 123.15,138.58 123.15,102.048 125.04,100.158 v1(125.04,98.35) ; 123.39,118.44 128.109,118.431 P1.3@128.13,118.41
+5V: C19.2 C20.2 C21.2 C24.1 D6.2 DC1.1 P1.1 P1.31 P2.2 P3.20 pad.1 R11.1 R73.1 R74.2 U13.3 U13.8 U13.11 U13.20 U13.23 USB2.1 USB2.5 | length 314.3
  Top Layer w0.25: C19.2@89.396,169.542 90.016,169.543 90.465,169.094 90.465,167.201 89.93,166.665 U13.20@89.93,162.589
  Top Layer w0.28: pad.1@85.926,166.081 86.036,165.982 88.431,163.587 U13.23@88.431,162.589 ; C21.2@86.376,154.532 86.496,154.532 87.886,153.142 R73.1@89.406,153.142 89.156,153.392 88.676,153.392 v1(90.626,153.392) 91.696,153.392 R11.1@91.966,153.122
  Top Layer w0.3: v1(85.752,160.571) 86.002,160.821 U13.3@87.16,160.821 ; C21.2@86.376,154.532 86.376,155.781 86.866,156.272 87.925,156.272 88.416,156.762 U13.8@88.416,158.59 ; U13.11@89.914,158.59 89.914,157.275 90.445,156.742 91.817,156.742 92.957,155.601 92.957,153.442 92.635,153.122 R11.1@91.966,153.122
  Top Layer w0.6: v1(116.821,80.341) 131.35,80.341 132.399,81.387 132.399,122.149 132.007,122.54 128.766,122.538 P1.1@128.129,120.95 ; 128.13,80.341 P1.31@128.13,82.85
  Top Layer w0.8: R73.1@89.406,153.142 89.566,152.982 90.616,152.982 v1(90.616,152.812) 90.616,152.952 91.966,152.952 R11.1@91.966,153.122
  Top Layer w1: pad.1@78.196,166.922 78.196,166.992 81.266,166.992 81.857,166.373 C20.2@81.857,165.289 ; R74.2@86.376,169.632 87.206,169.632 87.246,169.592 89.346,169.592 C19.2@89.396,169.542
  Top Layer w1.3: 62.881,150.272 72.461,150.272 USB2.5@72.493,150.24 USB2.1@75.094,150.24
  Top Layer w1.7: 62.889,137.91 62.886,137.653 64.339,136.2 64.339,120.96 P2.2@64.23,120.96
  Top Layer w2: 62.884,137.76 62.879,157.696 63.953,158.761 DC1.1@71.954,158.761 ; DC1.1@71.955,158.75 74.8,158.75 75.33,158.75 76.73,160.15 76.73,165.456 pad.1@78.196,166.922
  Bottom Layer w0.6: P3.20@111.88,77.87 114.35,77.87 v1(116.821,80.341)
  Bottom Layer w0.8: pad.1@78.196,166.922 85.086,166.922 pad.1@85.926,166.082 ; v1@85.751,160.572 85.751,158.227 90.585,153.391 90.625,153.391 90.626,152.812 v1(90.616,152.812) ; v1@85.756,160.572 85.756,166.081 pad.1@85.926,166.081
  Bottom Layer w1: v1@87.746,169.292 87.786,169.222 v1(87.786,169.902)
  Bottom Layer w1.5: pad.1@78.196,166.922 81.284,170.01 126.358,170.01 129.267,167.102 129.299,156.021 128.202,154.939 128.187,120.95 P1.1@128.241,120.95
  other v1: 87.746,169.292
ADC_3.3V: L1.2 U1.33 | length 7.3
  Top Layer w0.254: L1.2@88.789,96.78 88.789,96.841 90.697,96.841 93.907,100.059 U1.33@94.71,100.06
B1_1: B1.1 D4.1 | length 9.6
  Top Layer w0.3: v1(75.96,89.55) 81.91,95.5 D4.1@83.06,95.5
C32_2: C32.2
C43_1: C43.1
E3.3V: C28.2 C39.2 L5.2 R14.2 R17.2 R34.1 R35.1 R36.1 R38.2 R40.2 R41.2 R42.2 U5.1 U5.9 U5.19 | length 85.6
  Top Layer w0.254: R34.1@92.73,125.76 92.73,125.374 v1(93.165,124.939) ; R36.1@96.65,125.76 96.65,125.518 v1(97.229,124.939)
  Top Layer w0.28: v1(92.036,136.999) 92.343,136.692 U5.1@92.93,136.692 ; R34.1@92.729,125.759 93.29,125.759 93.689,126.16 93.689,128.131 94.69,129.129 U5.9@94.685,133.549
  Top Layer w0.4: v1(96.78,137.73) 101.22,137.73 101.469,137.481 R14.2@101.469,136.96
  Top Layer w0.5: R35.1@90.47,125.74 v1(91.65,125.74) ; v1(91.65,125.74) 92.71,125.74 R34.1@92.73,125.76 ; 96.34,137.57 96.44,137.73 v1(96.78,137.73) ; L5.2@100.23,144.26 102.65,144.26 103.859,145.469 112.129,145.469 112.8,146.139 R17.2@112.8,146.889
  Top Layer w0.6: R17.2@112.812,146.914 R38.2@114.841,146.914 v1(114.841,147.966) ; v1(118.241,147.916) 118.27,147.887 R40.2@118.27,146.914 ; v1(121.541,147.916) 121.699,147.758 R42.2@121.699,146.914 ; v1(124.891,147.916) 125.128,147.679 R41.2@125.128,146.914
  Top Layer w0.8: v1(95.586,141.649) 95.591,144.113 95.737,144.26 L5.2@100.23,144.26 ; 97.963,144.26 98.03,144.192 C39.2@98.03,143.544
  Bottom Layer w0.254: v1(93.165,124.939) 93.165,124.685 93.673,124.177 96.721,124.177 97.229,124.685 v1(97.229,124.939)
  Bottom Layer w0.5: 91.987,125.748 91.609,125.748 91.609,136.886 v1@92.035,136.998 ; v1@92.035,136.998 92.035,137.049 92.715,137.73 v1(96.78,137.73) 95.586,137.73 v1(95.586,141.649)
  Bottom Layer w0.6: v1(114.841,147.966) 114.891,147.916 v1(118.241,147.916) v1(121.541,147.916) v1(124.891,147.916)
FB1: R2.1 R4.2 U13.14 | length 7.3
  Top Layer w0.28: U13.14@91.159,159.833 96.467,159.833 R4.2@96.476,159.842 96.476,157.892 R2.1@96.466,157.882
FB2: R7.1 R8.2 U13.5 | length 7.3
  Top Layer w0.28: R8.2@81.858,157.669 R7.1@81.858,159.574 82.107,159.823 U13.5@87.16,159.823
FB3: R5.1 R6.2 U13.2 | length 7.3
  Top Layer w0.28: R5.1@81.858,163.384 81.858,161.479 82.016,161.322 U13.2@87.16,161.321
GND: B1.2 C1.1 C2.1 C3.1 C4.1 C5.1 C6.1 C7.1 C8.1 C9.1 C10.1 C11.1 C12.1 C13.1 C14.1 C15.1 C17.1 C18.1 C19.1 C20.1 C21.1 C23.1 C24.2 C25.1 C26.1 C27.1 C28.1 C29.2 C30.1 C31.2 C33.2 C34.2 C35.2 C36.2 C37.2 C38.2 C39.1 C40.2 C41.1 C42.2 C46.1 C47.1 C48.1 C49.1 C50.1 C57.1 DC1.2 DC1.3 DEBUG.b LED4.2 P1.2 P1.4 P1.32 P2.1 P2.31 P3.19 R1.1 R4.1 R6.1 R8.1 R37.1 R45.1 R46.1 R47.1 R48.1 R49.1 R51.1 R52.1 R69.1 RJ1.8 RJ1.13 RJ1.14 SW1.1 SW1.2 SW1.3 SW1.4 SW2.1 SW2.2 SW3.1 TF_CARD1.6 TF_CARD1.10 TF_CARD1.11 TF_CARD1.12 TF_CARD1.13 U1.64 U1.95 U1.128 U3.2 U3.13 U3.23 U3.25 U3.36 U3.48 U4.4 U5.25 U9.1 U13.1 U13.4 U13.6 U13.13 U13.18 U13.21 U13.25 UART0.1 USB1.0 USB1.5 USB2.0 USB2.4 USB2.8 X1.2 X1.4 X3.2 X3.4 | length 35.2
  Top Layer w0.24: U1.95@108.51,113.459 108.511,113.46 v1(110.15,113.46) ; v1(118.24,150.127) 118.27,150.097 C38.2@118.27,149.327
  Top Layer w0.25: U13.25@89.16,160.577 89.16,161.703 89.429,161.972 89.429,162.072 U13.21@89.429,162.59
  Top Layer w0.254: R37.1@94.79,125.74 94.79,125.727 v1(95.705,124.812)
  Top Layer w0.28: X1.4@85.39,135.78 85.598,135.988 C40.2@85.598,137.699 ; U13.6@87.16,159.322 87.904,159.323 U13.25@89.16,160.577 ; U13.4@87.16,160.323 88.905,160.323 U13.25@89.16,160.577 ; U13.1@87.16,161.822 87.915,161.822 88.544,161.193 U13.25@89.16,160.577 ; C41.1@87.274,132.348 87.274,133.637 X1.2@87.586,133.949 ; U13.13@91.159,159.333 90.404,159.333 U13.25@89.16,160.577 ; U13.18@91.159,161.832 90.583,161.832 v1(89.922,161.171) 89.753,161.171 U13.25@89.16,160.577 ; C46.1@104.15,122.504 105.834,122.504 105.87,122.54 X3.2@105.87,122.88 ; X3.4@108.07,121.28 108.486,121.696 C49.1@109.75,121.696
  Top Layer w0.3: v1(91.85,94.71) 91.87,94.73 C47.1@91.87,95.376 ; C47.1@91.87,95.376 91.87,95.139 92.439,94.57 97.301,94.57 97.71,94.979 C48.1@97.71,95.286 97.71,94.67 v1(97.72,94.66) ; R48.1@92.035,145.651 92.05,145.666 v1(92.05,147.01)
  other v1: 86.048,76.11 86.048,76.77 86.048,77.429 105.44,80.37 106.13,80.4 106.81,80.4 87.209,81.631 97.76,82.28 98.46,82.28 87.209,82.291 99.13,82.29 112.69,85.5 112.67,86.23 94.46,86.86 95.12,86.86 95.78,86.86 86.15,88.54 71.2,89.48 71.72,90.04 94.3,90.25 95.03,90.25 95.75,90.25 122.51,91.03 123.24,91.04 109.53,93.45 110.37,93.47 87.17,94.2 87.83,94.2 88.49,94.2 108.669,96.34 109.51,96.36 110.31,96.38 90.03,100.64 90.73,100.64 89.33,100.66 121.8,108.35 84.79,109.32 83.37,109.34 84.09,109.34 114.83,110.56 115.29,111.06 115.79,111.5 124.21,112.15 124.19,112.9 120.14,116.42 119.23,116.43 84.43,117.5 85.09,117.5 85.75,117.5 108.11,120.38 92.55,121.76 93.21,121.76 93.87,121.76 97.11,122.58 105.85,123.9 88.75,125.3 88.75,126.02 88.75,126.76 88.75,127.46 120.02,129.62 125.4,130.75 101.81,131.51 101.12,132.08 89.23,132.18 125.4,132.343 89.21,132.82 89.19,133.46 125.4,133.937 94.536,134.999 95.436,134.999 125.4,135.53 94.536,135.899 95.386,135.899 85.589,139.439 85.55,140.18 85.57,140.96 98.93,141.82 97.53,141.83 98.2,141.83 90.16,147 113.84,149.31 117.3,149.31 121.7,150.35 112.8,150.49 114.82,150.49 125.1,150.55 121.7,151.05 125.1,151.23 125.12,151.93 105.05,159.72 105.77,159.72 106.5,159.72 88.372,160.121 89.172,160.121 89.922,160.121 105.03,160.55 105.75,160.55 106.48,160.55 88.372,161.171 89.172,161.171
GND1: R1.2 U1.32 | length 5.6
  Top Layer w0.254: R1.2@88.79,98.8 90.651,98.8 U1.32@93.31,101.46
LINK_LED: R45.2 RJ1.12 U5.3 | length 52.9
  Top Layer w0.28: R45.2@90.13,144.251 90.244,144.137 90.244,136.369 90.922,135.691 U5.3@92.93,135.691 ; R45.2@90.13,144.251 90.641,144.252 91.04,144.649 91.04,147.229 91.949,148.138 107.649,148.138 109.069,149.558 109.071,160.831 110.829,162.581 110.829,166.31 111.413,166.934 RJ1.12@112.475,166.934
LX1: L4.2 U13.12 | length 21.8
  Top Layer w0.28: U13.12@90.415,158.59 91.578,158.591 94.395,155.771 94.395,154.321 94.555,154.321 94.136,154.743 94.136,155.682 91.471,158.347 U13.12@90.476,158.347 ; U13.12@90.554,158.827 91.695,158.827 94.626,155.891 94.626,153.384 L4.2@94.555,154.324
LX2: L2.2 U13.7 | length 20.4
  Top Layer w0.3: L2.2@83.8,154.608 83.8,156.389 86.208,158.796 87.75,158.796 ; L2.2@83.912,154.189 84.207,154.189 84.207,156.173 86.409,158.375 U13.7@87.862,158.375 ; L2.2@83.966,154.402 83.966,156.282 86.274,158.591 U13.7@87.915,158.59
LX3: L7.2 U13.24 | length 29.3
  Top Layer w0.28: L7.2@84.171,169.429 83.775,169.429 83.775,165.012 86.424,162.342 87.773,162.342 87.931,162.589 86.516,162.589 84.006,165.119 84.006,169.607 L7.2@84.329,169.607 ; L7.2@84.306,169.83 84.255,169.83 84.255,165.218 86.602,162.853 87.908,162.853 U13.24@87.908,162.812
P1_29: P1.29
P3_18: P3.18
PA0: P2.9 U1.2 | length 33.8
  Top Layer w0.254: P2.9@61.69,110.8 62.93,109.561 67.192,109.561 71.086,113.46 U1.2@93.31,113.459
PA1: P2.12 U1.3 | length 31.8
  Top Layer w0.254: P2.12@63.9,108.05 66.77,108.05 71.761,113.041 U1.3@93.651,113.041
PA2: P2.11 U1.4 | length 34.5
  Top Layer w0.254: P2.11@61.69,108.26 62.922,107.029 66.75,107.029 72.381,112.662 U1.4@93.31,112.661
PA3: P2.14 U1.5 | length 31.8
  Top Layer w0.254: P2.14@64.23,105.72 66.491,105.72 73.031,112.261 U1.5@93.31,112.26
PA4: P2.13 U1.6 | length 35.2
  Top Layer w0.254: P2.13@61.69,105.72 62.952,104.461 66.082,104.461 73.521,111.862 U1.6@93.31,111.861
PA5: P2.16 U1.7 | length 32.5
  Top Layer w0.254: P2.16@64.23,103.18 65.779,103.18 74.057,111.458 U1.7@93.31,111.46
PA6: P2.15 U1.8 | length 35.9
  Top Layer w0.254: P2.15@61.69,103.18 62.97,101.9 65.388,101.9 74.542,111.047 U1.8@93.31,111.061
PA7: P2.18 U1.14 | length 32.4
  Top Layer w0.254: P2.18@64.23,100.64 65.04,100.64 73.062,108.662 U1.14@93.31,108.661
PA8: P2.17 U1.15 | length 35.8
  Top Layer w0.254: P2.17@61.69,100.64 62.98,99.35 64.639,99.35 73.552,108.26 U1.15@93.31,108.259
PA9: P2.20 U1.16 | length 33.2
  Top Layer w0.254: P2.20@64.23,98.1 64.179,98.1 73.941,107.862 U1.16@93.31,107.86
PA10: P2.19 U1.17 | length 37.6
  Top Layer w0.254: P2.19@61.69,98.1 62.991,96.8 65.371,96.8 65.973,97.402 65.962,99.063 74.372,107.46 U1.17@93.31,107.459
PA11: P2.22 U1.18 | length 35.2
  Top Layer w0.254: P2.22@64.23,95.56 65.581,95.56 66.549,96.536 66.549,98.771 74.796,107.062 U1.18@93.31,107.06
PA12: P2.21 U1.19 | length 38.7
  Top Layer w0.254: P2.21@61.67,95.56 61.868,95.56 62.917,94.45 65.652,94.445 67.052,95.837 67.049,98.476 75.292,106.66 U1.19@93.31,106.659
PB0: P2.32 U1.29 | length 38.8
  Top Layer w0.254: P2.32@64.23,82.86 65,82.86 67.865,85.723 67.857,88.329 72.157,92.634 73.587,92.637 83.61,102.66 U1.29@93.31,102.659
PB1: P1.26 U1.36 | length 42.9
  Top Layer w0.2: v1@94.789,97.94 95.909,99.058 U1.36@95.909,100.059
  Bottom Layer w0.2: v1(94.75,97.88) 94.751,97.379 95.231,96.899 97.59,96.899 98.711,98.019 120.141,98.019 126.47,91.69 129.56,91.69 P1.26@130.781,90.47
PB2: P1.24 U1.38 | length 39.6
  Top Layer w0.2: v1@96.41,97.94 96.709,98.239 U1.38@96.709,100.06
  Bottom Layer w0.2: v1@96.43,97.9 96.943,97.9 98.043,99.061 120.694,99.061 125.449,94.227 129.44,94.23 130.669,93.01 P1.24@130.781,93.01
  other v1: 96.43,97.9
PB3: P1.23 U1.37 | length 38.4
  Top Layer w0.2: v1@95.63,97.94 95.63,98.1 96.31,98.779 U1.37@96.31,100.059
  Bottom Layer w0.2: v1@95.609,97.879 95.609,97.44 95.769,97.28 97.11,97.28 98.391,98.56 120.339,98.56 125.891,93.01 P1.23@128.241,93.01
  other v1: 95.61,97.88
PB4: P3.1 U1.31 | length 39
  Top Layer w0.254: v1(82.42,98.65) 85.632,101.862 U1.31@93.31,101.861
  Bottom Layer w0.3: v1(82.42,98.65) 82.42,86.64 83.97,85.09 83.97,80.79 87.44,77.32 87.44,75.68 87.79,75.33 P3.1@89.02,75.33
PB5: P1.25 U1.35 | length 41.6
  Top Layer w0.2: v1(93.83,98.06) 93.83,98.16 94.05,98.38 94.15,98.48 94.77,98.48 95.51,99.22 U1.35@95.51,100.06
  Bottom Layer w0.2: v1@93.829,98.06 93.829,97.501 94.23,97.079 94.751,96.559 98.231,96.559 99.069,97.399 120.059,97.399 126.991,90.47 P1.25@128.241,90.47